# EAGLE board InkTime_v2 (EAGLE 9.7.0)
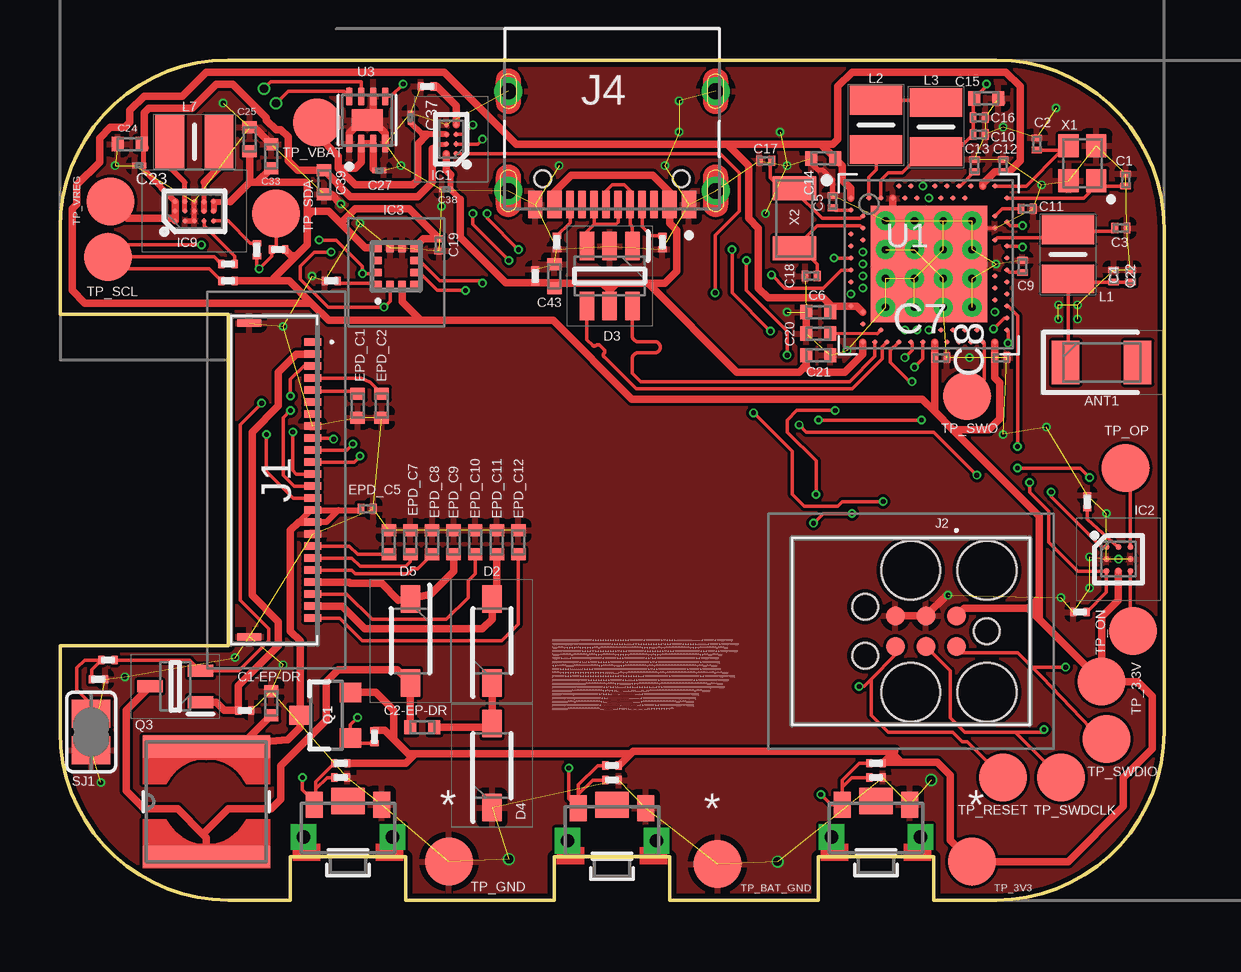
[diagram p0: board, top side]
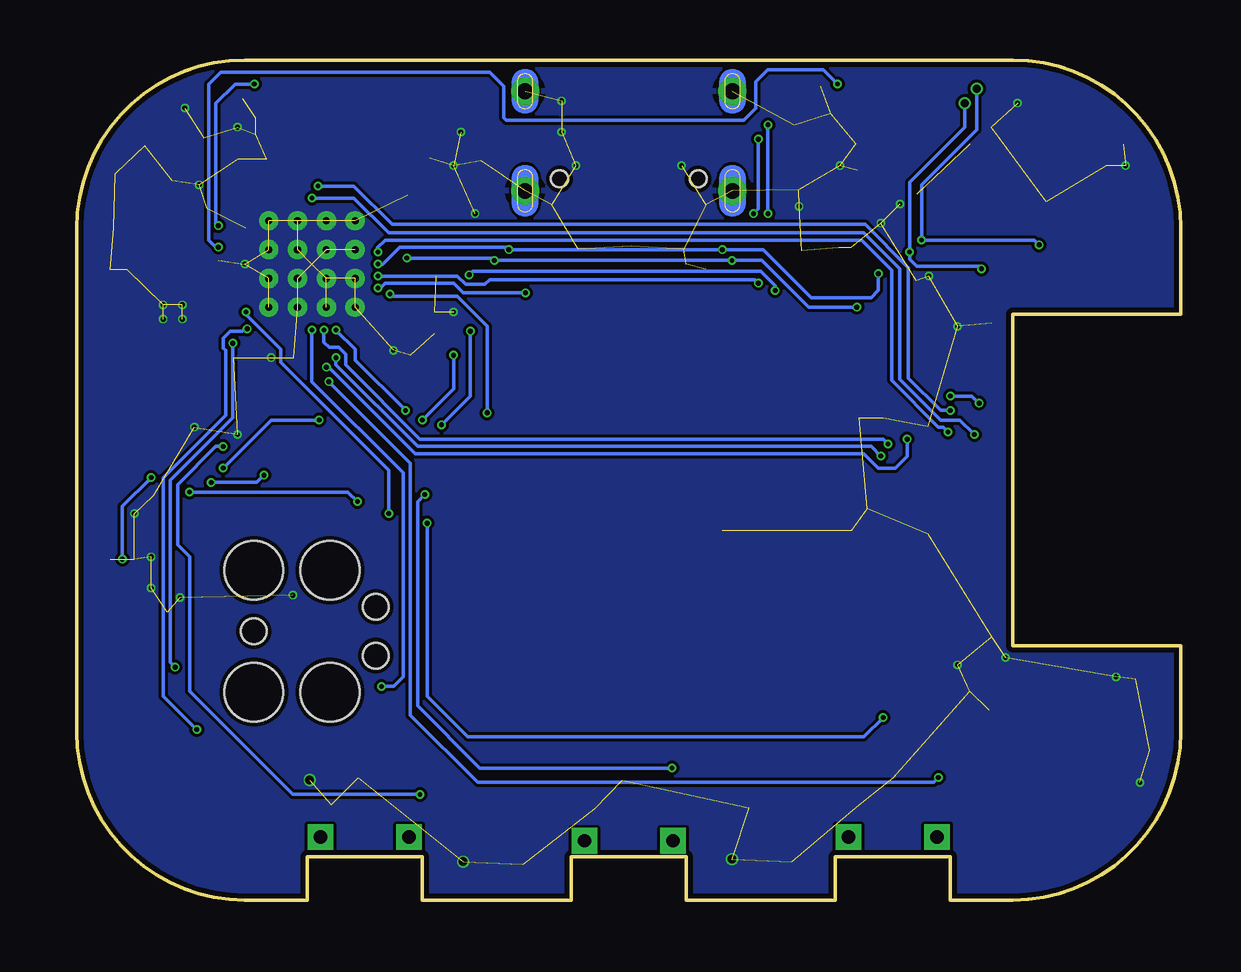
[diagram p1: board, bottom side, seen from below]

Size 46 x 35 mm. Coordinates in mm from the lower left corner, seen from the top.
Outline: 39,0 36.4,0 36.4,1.8 31.6,1.8 31.6,0 25.4,0 25.4,1.8 20.6,1.8 20.6,0 14.4,0 14.4,1.8 9.6,1.8 9.6,0 7,0 arc-90 0,7 0,10.6 7,10.6 7,24.4 0,24.4 0,28 arc-90 7,35 39,35 arc-90 46,28 46,7 arc-90 39,0
Copper layers (1*16): Top 0.035mm / dielectric 1.6mm / Bottom 0.035mm
Design rules "jlcpcb-2layers.dru *": minimum track width 5mil, minimum drill 0.2mm, track to track 5mil, track to pad 5mil, pad to pad 5mil, via to via 5mil, smd to smd 5mil, copper to edge 0.2mm, drill to drill 6mil, minimum pad ring 10mil, minimum via ring 3mil, stop-mask expansion 4mil, vias tented up to drill 999mm, thermal gap 10mil

## Footprints (pad centres in the part's own frame; a part is rotated, then mirrored left to right if it is on the bottom)
2450AT18B100E_ANTC3216X140N = smd 1.15 x 1.8: 1 -1.5,0; 2 1.5,0
NORDIC_NRF_3_RESC0201_L = smd 0.28 x 0.43: 1 -0.255,0; 2 0.255,0
NORDIC_NRF_3_RESC0402_L = smd 0.5 x 0.6: 1 -0.5,0; 2 0.5,0
GRM011R60J152KE01L_2_CAPC0201X13N = smd 0.22 x 0.23: 1 -0.185,0; 2 0.185,0
GRM011R60J152KE01L_1_0201 = smd 0.35 x 0.25: 1 0,0.275; 2 0,-0.275
ESP32_C6_LIBRARY_5_SOD3716X135N = smd 1.15 x 0.8: 1 -1.75,0; 2 1.75,0
ESP32_C6_LIBRARY_3_SOT95P280X145-6N = smd 1.2 x 0.6: 1 -1.25,0.95; 2 -1.25,0; 3 -1.25,-0.95; 4 1.25,-0.95; 5 1.25,0; 6 1.25,0.95
BQ25180YBGR_BGA8C40P2X4_100X155X50 = smd 0.2 x 0.2: A1 -0.2,0.6; A2 0.2,0.6; B1 -0.2,0.2; B2 0.2,0.2; C1 -0.2,-0.2; C2 0.2,-0.2; D1 -0.2,-0.6; D2 0.2,-0.6
DRV2605YZFR_BGA9C50P3X3_144X144X62 = smd 0.25 x 0.25: A1 -0.5,0.5; A2 0,0.5; A3 0.5,0.5; B1 -0.5,0; B2 0,0; B3 0.5,0; C1 -0.5,-0.5; C2 0,-0.5; C3 0.5,-0.5
BMA423_BMA423 = smd 0.3 x 0.35: 1 -0.75,-0.775; 2 -0.25,-0.775; 3 0.25,-0.775; 4 0.75,-0.775; 7 0.75,0.775; 8 0.25,0.775; 9 -0.25,0.775; 10 -0.75,0.775 | smd 0.35 x 0.3: 5 0.775,-0.25; 6 0.775,0.25; 11 -0.775,0.25; 12 -0.775,-0.25
RT6160AWSC_BGA15C40P3X5_140X230X60 = smd 0.216 x 0.216: A1 -0.4,0.8; A2 0,0.8; A3 0.4,0.8; B1 -0.4,0.4; B2 0,0.4; B3 0.4,0.4; C1 -0.4,0; C2 0,0; C3 0.4,0; D1 -0.4,-0.4; D2 0,-0.4; D3 0.4,-0.4; E1 -0.4,-0.8; E2 0,-0.8; E3 0.4,-0.8
503480-2400_5034802400 = smd 0.3 x 0.7: 1 -5.75,1.525; 2 -5.25,1.525; 3 -4.75,1.525; 4 -4.25,1.525; 5 -3.75,1.525; 6 -3.25,1.525; 7 -2.75,1.525; 8 -2.25,1.525; 9 -1.75,1.525; 10 -1.25,1.525; 11 -0.75,1.525; 12 -0.25,1.525; 13 0.25,1.525; 14 0.75,1.525; 15 1.25,1.525; 16 1.75,1.525; 17 2.25,1.525; 18 2.75,1.525; 19 3.25,1.525; 20 3.75,1.525; 21 4.25,1.525; 22 4.75,1.525; 23 5.25,1.525; 24 5.75,1.525 | smd 0.3 x 1: MP1 -6.54,-1.125; MP2 6.54,-1.125
TC2030-IDC_TC2030IDC = smd 0.783 x 0.783: 1 -0.953,-0.635; 2 -0.953,0.635; 3 0.317,-0.635; 4 0.317,0.635; 5 1.588,-0.635; 6 1.588,0.635 | hole 2.451: -2.223,-2.54; -2.223,2.54; 0.952,-2.54; 0.952,2.54 | hole 1.067: -2.223,0; 2.857,-1.016; 2.857,1.016
KH-TYPE-C-16P_KINGHELM_KH-TYPE-C-16P = smd 0.6 x 1.15: A1_B12 -3.2,4.725; A4_B9 -2.4,4.725; A9_B4 2.4,4.725; A12_B1 3.2,4.725 | smd 0.3 x 1.15: A5 -1.25,4.725; A6 -0.25,4.725; A7 0.25,4.725; A8 1.25,4.725; B5 1.75,4.725; B6 0.75,4.725; B7 -0.75,4.725; B8 -1.75,4.725 | drill 0.65 pad 1.05: SH1 -4.32,0; SH2 4.32,0; SH3 -4.32,4.15; SH4 4.32,4.15 | hole 0.7: -2.89,3.65; 2.89,3.65
MLP2016SR47MT0S1_INDC2016X100N = smd 1.2 x 2.2: 1 -1.028,0; 2 1.028,0
ESP32_C6_LIBRARY_2_IND_4828-WE-TPC_WRE = smd 0.9 x 5.3: 1 -2.286,0; 2 2.286,0
ESP32_C6_LIBRARY_4_ESP32_C6_LIBRARY_4_ESP32_C6_LIBRARY_4_ESP32_C6_LIBRARY_4_ESP32_WROVER_SPARKFUN-DISCRETESEMI_SOT23-3 = smd 0.8 x 0.9: 1 -0.95,-1; 2 0.95,-1; 3 0,1.1
ESP32_C6_LIBRARY_6_SOT65P210X110-3N = smd 1.05 x 0.5: 1 -1.05,0.65; 2 -1.05,-0.65; 3 1.05,0
ERA-1AEB3401C_0201 = smd 0.35 x 0.25: 1 0,0.275; 2 0,-0.275
ESP32_C6_LIBRARY_7_JUMPER_SJ = smd 1.168 x 1.6: 1 -0.762,0; 2 0.762,0
2025-10-22_07-23-44_LIBRARY_SW_EVP-AKE31A_PAN = smd 0.711 x 1.092: 1 -1.4,-0.972; 2 1.4,-0.972 | drill 0.559 pad 0.914 square: 3 -1.848,0.381; 4 1.848,0.381 | smd 1.397 x 1.092: 5 0,-1.124
HECTOR_WATCH_1_TP20R = smd 2 x 2: TP 0,0
NORDIC_NRF_4_AQFN50P700X700X85_HS-74N = smd 4.85 x 4.85: P$74 0,0 | drill 0.3 pad 0.6: P$75 -1.8,1.8; P$76 -0.6,1.8; P$77 0.6,1.8; P$78 1.8,1.8; P$79 -1.8,0.6; P$80 -0.6,0.6; P$81 0.6,0.6; P$82 1.8,0.6; P$83 -1.8,-0.6; P$84 -0.6,-0.6; P$85 0.6,-0.6; P$86 1.8,-0.6; P$87 -1.8,-1.8; P$88 -0.6,-1.8; P$89 0.6,-1.8; P$90 1.8,-1.8 | smd 0.2 x 0.2: P$A8 -1.25,3.25; P$A10 -0.75,3.25; P$A12 -0.25,3.25; P$A14 0.25,3.25; P$A16 0.75,3.25; P$A18 1.25,3.25; P$A20 1.75,3.25; P$A22 2.25,3.25; P$A23 2.75,3.25; P$AA24 3.25,-2.25; P$AB2 -2.75,-2.5; P$AC5 -2,-2.75; P$AC9 -1,-2.75; P$AC11 -0.5,-2.75; P$AC13 0,-2.75; P$AC15 0.5,-2.75; P$AC17 1,-2.75; P$AC19 1.5,-2.75; P$AC21 2,-2.75; P$AC24 3.25,-2.75; P$AD2 -2.75,-3.25; P$AD4 -2.25,-3.25; P$AD6 -1.75,-3.25; P$AD8 -1.25,-3.25; P$AD10 -0.75,-3.25; P$AD12 -0.25,-3.25; P$AD14 0.25,-3.25; P$AD16 0.75,-3.25; P$AD18 1.25,-3.25; P$AD20 1.75,-3.25; P$AD22 2.25,-3.25; P$AD23 2.75,-3.25; P$B1 -3.25,2.75; P$B3 -2.5,2.75; P$B5 -2,2.75; P$B7 -1.5,2.75; P$B9 -1,2.75; P$B11 -0.5,2.75; P$B13 0,2.75; P$B15 0.5,2.75; P$B17 1,2.75; P$B19 1.5,2.75; P$B24 3.25,2.75; P$C1 -3.25,2.25; P$D2 -2.75,2; P$D23 2.75,2; P$E24 3.25,1.75; P$F2 -2.75,1.5; P$F23 2.75,1.5; P$G1 -3.25,1.25; P$H2 -2.75,1; P$H23 2.75,1; P$J1 -3.25,0.75; P$J24 3.25,0.75; P$K2 -2.75,0.5; P$L1 -3.25,0.25; P$L24 3.25,0.25; P$M2 -2.75,0; P$N1 -3.25,-0.25; P$N24 3.25,-0.25; P$P2 -2.75,-0.5; P$P23 2.75,-0.5; P$R1 -3.25,-0.75; P$R24 3.25,-0.75; P$T2 -2.75,-1; P$T23 2.75,-1; P$U1 -3.25,-1.25; P$U24 3.25,-1.25; P$V23 2.75,-1.5; P$W1 -3.25,-1.75; P$W24 3.25,-1.75; P$Y2 -2.75,-2; P$Y23 2.75,-2
ESP32_C6_LIBRARY_SON50P200X200X80-9N = smd 0.76 x 0.27: 1 -0.985,0.75; 2 -0.985,0.25; 3 -0.985,-0.25; 4 -0.985,-0.75; 5 0.985,-0.75; 6 0.985,-0.25; 7 0.985,0.25; 8 0.985,0.75 | smd 0.9 x 1.3: 9 0,0
NORDIC_NRF_BT-XTAL_2016_N = smd 0.95 x 0.85: 1 -0.725,-0.575; 2 0.725,-0.575; 3 0.725,0.575; 4 -0.725,0.575
NORDIC_NRF_1_XTAL_3215_N = smd 1 x 1.8: 1 -1.25,0; 2 1.25,0

## Placement (x,y rotation side)
ANT1  2450AT18B100E  [2450AT18B100E_ANTC3216X140N]  43.4,22.4 0 top
C1  12pF  [NORDIC_NRF_3_RESC0201_L]  44.4,30 90 top
C1-EP-DR  10uF  [NORDIC_NRF_3_RESC0402_L]  8.8,8.2 90 top
C2  12pF  [NORDIC_NRF_3_RESC0201_L]  40.7,31.5 90 top
C2-EP-DR  4.7uF/25V  [NORDIC_NRF_3_RESC0402_L]  15.1,7.2 180 top
C3  1pF  [NORDIC_NRF_3_RESC0201_L]  44.2,28 0 top
C4  1pF  [NORDIC_NRF_3_RESC0201_L]  43.9,26 90 top
C5  100nF  [NORDIC_NRF_3_RESC0201_L]  32.2,29.1 90 top
C6  4.7uF  [NORDIC_NRF_3_RESC0402_L]  31.6,24.5 180 top
C7  100nF  [NORDIC_NRF_3_RESC0201_L]  36.7,22.6 0 top
C8  100nF  [NORDIC_NRF_3_RESC0201_L]  39.2,22.6 0 top
C9  820pF  [NORDIC_NRF_3_RESC0201_L]  40.1,26.4 90 top
C10  N.C.  [NORDIC_NRF_3_RESC0201_L]  38.3,31.9 0 top
C11  100nF  [NORDIC_NRF_3_RESC0201_L]  40.3,28.8 0 top
C12  100nF  [NORDIC_NRF_3_RESC0201_L]  39.3,30.6 90 top
C13  N.C.  [NORDIC_NRF_3_RESC0201_L]  38.1,30.6 90 top
C14  4.7uF  [NORDIC_NRF_3_RESC0402_L]  31.8,30.9 180 top
C15  1.0uF  [NORDIC_NRF_3_RESC0402_L]  38.6,33.4 0 top
C16  47nF  [NORDIC_NRF_3_RESC0201_L]  38.3,32.6 0 top
C17  12pF  [NORDIC_NRF_3_RESC0201_L]  29.4,30.8 0 top
C18  12pF  [NORDIC_NRF_3_RESC0201_L]  31.3,26 0 top
C19  100nF  [NORDIC_NRF_3_RESC0201_L]  15.8,27.3 270 top
C20  4.7uF  [NORDIC_NRF_3_RESC0402_L]  31.6,23.6 180 top
C21  4.7uF  [NORDIC_NRF_3_RESC0402_L]  31.6,22.7 0 top
C22  N.C.  [NORDIC_NRF_3_RESC0201_L]  44.6,26 90 top
C23  0.1uF  [GRM011R60J152KE01L_2_CAPC0201X13N]  3.3,30.6 0 top
C24  10uF  [NORDIC_NRF_3_RESC0402_L]  2.9,31.5 0 top
C25  22uF  [NORDIC_NRF_3_RESC0402_L]  7.9,31.7 90 top
C27  0.1uF  [GRM011R60J152KE01L_2_CAPC0201X13N]  13.3,30.4 180 top
C29  1uF  [GRM011R60J152KE01L_1_0201]  34,5.1 90 top
C30  1uF  [GRM011R60J152KE01L_1_0201]  11.7,5.1 90 top
C31  1uF  [GRM011R60J152KE01L_1_0201]  23,5 90 top
C32  1uF  [GRM011R60J152KE01L_1_0201]  42.8,16.6 0 top
C33  22uF  [NORDIC_NRF_3_RESC0402_L]  8.8,31 90 top
C34  0.1uF  [GRM011R60J152KE01L_1_0201]  42.5,12 90 top
C37  1uF  [GRM011R60J152KE01L_2_CAPC0201X13N]  14.6,32.6 270 top
C38  1uF  [GRM011R60J152KE01L_2_CAPC0201X13N]  16.1,29.6 0 top
C39  10uF  [NORDIC_NRF_3_RESC0402_L]  11,29.9 270 top
C42  0.1uF  [GRM011R60J152KE01L_1_0201]  19.8,26 180 top
C43  4.7uF  [NORDIC_NRF_3_RESC0402_L]  20.6,26 90 top
D2  MBR0530  [ESP32_C6_LIBRARY_5_SOD3716X135N]  18,10.8 90 top
D3  USBLC6-2SC6Y  [ESP32_C6_LIBRARY_3_SOT95P280X145-6N]  22.9,26 270 top
D4  MBR0530  [ESP32_C6_LIBRARY_5_SOD3716X135N]  18,5.6 90 top
D5  MBR0530  [ESP32_C6_LIBRARY_5_SOD3716X135N]  14.6,10.8 270 top
EPD_C1  1uF/50V  [NORDIC_NRF_3_RESC0402_L]  12.4,20.6 90 top
EPD_C2  1uF/50V  [NORDIC_NRF_3_RESC0402_L]  13.4,20.6 90 top
EPD_C5  0.1uF/50V  [NORDIC_NRF_3_RESC0201_L]  12.8,16.3 180 top
EPD_C6  1uF/50V  [NORDIC_NRF_3_RESC0402_L]  13.7,14.9 270 top
EPD_C7  1uF/50V  [NORDIC_NRF_3_RESC0402_L]  14.6,14.9 270 top
EPD_C8  1uF/50V  [NORDIC_NRF_3_RESC0402_L]  15.5,14.9 270 top
EPD_C9  1uF/50V  [NORDIC_NRF_3_RESC0402_L]  16.4,14.9 270 top
EPD_C10  1uF/50V  [NORDIC_NRF_3_RESC0402_L]  17.3,14.9 270 top
EPD_C11  1uF/50V  [NORDIC_NRF_3_RESC0402_L]  18.2,14.9 270 top
EPD_C12  1uF/50V  [NORDIC_NRF_3_RESC0402_L]  19.1,14.9 270 top
IC1  BQ25180YBGR_BQ25180YBGR  [BQ25180YBGR_BGA8C40P2X4_100X155X50]  16.3,31.7 180 top
IC2  DRV2605YZFR  [DRV2605YZFR_BGA9C50P3X3_144X144X62]  44.1,14.2 0 top
IC3  BMA423  [BMA423_BMA423]  14,26.4 0 top
IC9  RT6160AWSC  [RT6160AWSC_BGA15C40P3X5_140X230X60]  5.6,28.7 90 top
J1  503480-2400  [503480-2400_5034802400]  9,17.5 270 top
J2  TC2030-IDC  [TC2030-IDC_TC2030IDC]  36.4,11.2 180 top
J4  KH-TYPE-C-16P  [KH-TYPE-C-16P_KINGHELM_KH-TYPE-C-16P]  23,33.7 180 top
L1  3.9nH  [MLP2016SR47MT0S1_INDC2016X100N]  42,26.9 90 top
L2  10uH  [MLP2016SR47MT0S1_INDC2016X100N]  34,32.3 90 top
L3  15uH  [MLP2016SR47MT0S1_INDC2016X100N]  36.5,32.2 270 top
L5  68uH  [ESP32_C6_LIBRARY_2_IND_4828-WE-TPC_WRE]  6.1,4.1 90 top
L7  FTC252012SR47MBCA  [MLP2016SR47MT0S1_INDC2016X100N]  5.6,31.6 0 top
Q1  20V/4.2A/52mΩ/1.4W  [ESP32_C6_LIBRARY_4_ESP32_C6_LIBRARY_4_ESP32_C6_LIBRARY_4_ESP32_C6_LIBRARY_4_ESP32_WROVER_SPARKFUN-DISCRETESEMI_SOT23-3]  11.1,7.7 90 top
Q3  SI1308EDL-T1-GE3  [ESP32_C6_LIBRARY_6_SOT65P210X110-3N]  4.8,8.9 180 top
R1_EP_DR  0.47  [ERA-1AEB3401C_0201]  2,10 90 top
R1_USB  5K1  [ERA-1AEB3401C_0201]  25.1,27.4 180 top
R2  0  [ERA-1AEB3401C_0201]  8.2,27.1 180 top
R2_EP_DR  10K  [ERA-1AEB3401C_0201]  7.7,7.9 270 top
R2_USB  5K1  [ERA-1AEB3401C_0201]  20.7,27.4 0 top
R3  0  [ERA-1AEB3401C_0201]  11.3,25.8 90 top
R4  0  [ERA-1AEB3401C_0201]  7,26.5 90 top
R5  10K  [ERA-1AEB3401C_0201]  11.7,5.7 90 top
R7  10K  [ERA-1AEB3401C_0201]  34,5.7 90 top
R8  10K  [ERA-1AEB3401C_0201]  23,5.6 90 top
R9  10K  [ERA-1AEB3401C_0201]  15.3,33.9 90 top
R17  3K3  [ERA-1AEB3401C_0201]  7,25.8 270 top
R18  3K3  [ERA-1AEB3401C_0201]  9.1,27.1 270 top
R_PWR_EPD  10K  [ERA-1AEB3401C_0201]  13.1,6.8 180 top
R_TYPE_SEL  2.2  [ERA-1AEB3401C_0201]  1.6,9.2 270 top
SJ1  [ESP32_C6_LIBRARY_7_JUMPER_SJ]  1.3,7 90 top
SW_DN  2025-10-22_07-23-44_LIBRARY_EVP-AKE31ASW_EVP-AKE31A_PAN  [2025-10-22_07-23-44_LIBRARY_SW_EVP-AKE31A_PAN]  34,3 180 top
SW_ENT  2025-10-22_07-23-44_LIBRARY_EVP-AKE31ASW_EVP-AKE31A_PAN  [2025-10-22_07-23-44_LIBRARY_SW_EVP-AKE31A_PAN]  23,2.85 180 top
SW_UP  2025-10-22_07-23-44_LIBRARY_EVP-AKE31ASW_EVP-AKE31A_PAN  [2025-10-22_07-23-44_LIBRARY_SW_EVP-AKE31A_PAN]  12,3 180 top
TP_3.3V  HECTOR_WATCH_1_TPTP20R  [HECTOR_WATCH_1_TP20R]  43.4,9.1 270 top
TP_3V3  HECTOR_WATCH_1_TPTP20R  [HECTOR_WATCH_1_TP20R]  38,1.6 0 top
TP_BAT_GND  HECTOR_WATCH_1_TPTP20R  [HECTOR_WATCH_1_TP20R]  27.4,1.5 180 top
TP_GND  HECTOR_WATCH_1_TPTP20R  [HECTOR_WATCH_1_TP20R]  16.2,1.6 0 top
TP_ON  HECTOR_WATCH_1_TPTP20R  [HECTOR_WATCH_1_TP20R]  44.7,11.2 90 top
TP_OP  HECTOR_WATCH_1_TPTP20R  [HECTOR_WATCH_1_TP20R]  44.4,18 0 top
TP_RESET  HECTOR_WATCH_1_TPTP20R  [HECTOR_WATCH_1_TP20R]  39.3,5.1 0 top
TP_SCL  HECTOR_WATCH_1_TPTP20R  [HECTOR_WATCH_1_TP20R]  2,26.8 0 top
TP_SDA  HECTOR_WATCH_1_TPTP20R  [HECTOR_WATCH_1_TP20R]  9,28.6 90 top
TP_SWDCLK  HECTOR_WATCH_1_TPTP20R  [HECTOR_WATCH_1_TP20R]  41.7,5.1 0 top
TP_SWDIO  HECTOR_WATCH_1_TPTP20R  [HECTOR_WATCH_1_TP20R]  43.6,6.7 0 top
TP_SWO  HECTOR_WATCH_1_TPTP20R  [HECTOR_WATCH_1_TP20R]  37.8,21 270 top
TP_VBAT  HECTOR_WATCH_1_TPTP20R  [HECTOR_WATCH_1_TP20R]  10.7,32.4 180 top
TP_VREG  HECTOR_WATCH_1_TPTP20R  [HECTOR_WATCH_1_TP20R]  2.1,29.1 0 top
U1  NRF52840_QF  [NORDIC_NRF_4_AQFN50P700X700X85_HS-74N]  36.2,26.5 0 top
U3  MAX17048G+T10  [ESP32_C6_LIBRARY_SON50P200X200X80-9N]  12.8,32.5 90 top
X1  32MHz  [NORDIC_NRF_BT-XTAL_2016_N]  42.6,30.7 90 top
X2  32.768kHz  [NORDIC_NRF_1_XTAL_3215_N]  30.6,28.4 270 top

## Library data of the parts
ANT1 = InkTime_v5; ARROW_PART_NUMBER: 2450AT18B100E; ARROW_PRICE-STOCK: https://www.arrow.com/en/products/2450at18b100e/johanson-dielectrics?utm_currency=USD&region=nac; DESCRIPTION: Antennas 2.45GHz ANTENNA; HEIGHT: 1.4mm; MANUFACTURER_NAME: JOHANSON TECHNOLOGY; MANUFACTURER_PART_NUMBER: 2450AT18B100E; MOUSER_PART_NUMBER: 609-2450AT18B100E; MOUSER_PRICE-STOCK: https://www.mouser.co.uk/ProductDetail/Johanson-Technology/2450AT18B100E?qs=yCnrNFeXz%252Bh5MFsFIXGZGA%3D%3D
C1 C1-EP-DR C2 C2-EP-DR C3-C22 C24 C25 C29-C34 C39 C42 C43 EPD_C1 EPD_C2 EPD_C5-EPD_C12 R1_EP_DR R1_USB R2 R2_EP_DR R2_USB R3-R5 R7-R9 R17 R18 R_PWR_EPD R_TYPE_SEL SJ1 TP_3.3V TP_3V3 TP_BAT_GND TP_GND TP_ON TP_OP TP_RESET TP_SCL TP_SDA TP_SWDCLK TP_SWDIO TP_SWO TP_VBAT TP_VREG U1 X1 X2 = InkTime_v5
C23 C27 C37 C38 = InkTime_v5; AVAILABILITY: In Stock; CHECK_PRICES: https://www.snapeda.com/parts/GRM011R60J152KE01L/Murata/view-part/?ref=eda; DESCRIPTION: SMD Capacitor X5R(EIA) with Capacitance: 1500pF Tol. 10%. Rated Voltage: 6.3Vdc; MF: Murata; MP: GRM011R60J152KE01L; PACKAGE: 0201 Murata; PRICE: None; SNAPEDA_LINK: https://www.snapeda.com/parts/GRM011R60J152KE01L/Murata/view-part/?ref=snap
D2 D4 D5 = InkTime_v5; AVAILABILITY: In Stock; CHECK_PRICES: https://www.snapeda.com/parts/MBR0530/Onsemi/view-part/?ref=eda; DESCRIPTION: Diode Schottky 30 V 500mA Surface Mount SOD-123; MF: ON Semiconductor; MP: MBR0530; PACKAGE: SOD-123-2 ON Semiconductor; PRICE: None; PURCHASE-URL: https://www.snapeda.com/api/url_track_click_mouser/?unipart_id=179458&manufacturer=ON Semiconductor&part_name=MBR0530&search_term=None; SNAPEDA_LINK: https://www.snapeda.com/parts/MBR0530/Onsemi/view-part/?ref=snap
D3 = InkTime_v5; AVAILABILITY: In Stock; CHECK_PRICES: https://www.snapeda.com/parts/USBLC6-2SC6Y/STMicroelectronics/view-part/?ref=eda; DESCRIPTION: 17V Clamp 5A (8/20µs) Ipp Tvs Diode Surface Mount SOT-23-6; MF: STMicroelectronics; MP: USBLC6-2SC6Y; PACKAGE: SOT-23-6 STMicroelectronics; PRICE: None; SNAPEDA_LINK: https://www.snapeda.com/parts/USBLC6-2SC6Y/STMicroelectronics/view-part/?ref=snap
IC1 = InkTime_v5; ARROW_PART_NUMBER: BQ25180YBGR; ARROW_PRICE-STOCK: https://www.arrow.com/en/products/bq25180ybgr/texas-instruments?utm_currency=USD&region=nac; DESCRIPTION: Charger IC Lithium Ion/Polymer, Lithium Iron Phosphate 8-DSBGA (1.6x1.1); HEIGHT: 0.5mm; MANUFACTURER_NAME: Texas Instruments; MANUFACTURER_PART_NUMBER: BQ25180YBGR; MOUSER_PART_NUMBER: 595-BQ25180YBGR; MOUSER_PRICE-STOCK: https://www.mouser.co.uk/ProductDetail/Texas-Instruments/BQ25180YBGR?qs=doiCPypUmgEWjAK%252BJAX6Tw%3D%3D
IC2 = InkTime_v5; ARROW_PART_NUMBER: DRV2605YZFR; ARROW_PRICE-STOCK: https://www.arrow.com/en/products/drv2605yzfr/texas-instruments?region=nac; DESCRIPTION: Haptic Driver for ERM/LRA with Built-In Library and Smart Loop Architecture; HEIGHT: 0.625mm; MANUFACTURER_NAME: Texas Instruments; MANUFACTURER_PART_NUMBER: DRV2605YZFR
IC3 = InkTime_v5; ARROW_PART_NUMBER: BMA423; ARROW_PRICE-STOCK: https://www.arrow.com/en/products/bma423/bosch; DESCRIPTION: Accelerometers Triaxial low-g 12bit Acceleration Sensor; HEIGHT: 1mm; MANUFACTURER_NAME: BOSCH; MANUFACTURER_PART_NUMBER: BMA423; MOUSER_PART_NUMBER: 262-BMA423; MOUSER_PRICE-STOCK: https://www.mouser.co.uk/ProductDetail/Bosch-Sensortec/BMA423?qs=HXFqYaX1Q2xC%252BSgeGoX3mg%3D%3D
IC9 = InkTime_v5; DESCRIPTION: Buck-Boost Regulator Positive Output Step-Up/Step-Down I2C DC-DC Controller IC 15-WL-CSP (BSC) (1.4x2.3); HEIGHT: 0.6mm; MANUFACTURER_NAME: RICHTEK; MANUFACTURER_PART_NUMBER: RT6160AWSC; MOUSER_PART_NUMBER: 835-RT6160AWSC; MOUSER_PRICE-STOCK: https://www.mouser.co.uk/ProductDetail/Richtek/RT6160AWSC?qs=amGC7iS6iy%2FLd9PSoixZXQ%3D%3D
J1 = InkTime_v5; DESCRIPTION: FFC & FPC Connectors 0.5mm FPC RA SMT Dual Contact 24Ckt; HEIGHT: 1.87mm; MANUFACTURER_NAME: Molex; MANUFACTURER_PART_NUMBER: 503480-2400; MOUSER_PART_NUMBER: 538-503480-2400; MOUSER_PRICE-STOCK: https://www.mouser.co.uk/ProductDetail/Molex/503480-2400?qs=OAhjpuo3Vu7efIoxFh9AOw%3D%3D
J2 = InkTime_v5; DESCRIPTION: CABLE ADAPTER 6 POS; HEIGHT: 19mm; MANUFACTURER_NAME: Tag Connect; MANUFACTURER_PART_NUMBER: TC2030-IDC
J4 = InkTime_v5; AVAILABILITY: Not in stock; CHECK_PRICES: https://www.snapeda.com/parts/KH-TYPE-C-16P/Kinghelm/view-part/?ref=eda; MF: kinghelm; MP: KH-TYPE-C-16P; PACKAGE: None; PRICE: None; SNAPEDA_LINK: https://www.snapeda.com/parts/KH-TYPE-C-16P/Kinghelm/view-part/?ref=snap
L1-L3 L7 = InkTime_v5; DESCRIPTION: SMD / SMT Inductors (Coils), L=0.47?H, L x W x T :; HEIGHT: 1mm; JLCPCB: https://jlcpcb.com/partdetail/6763488-FTC252012SR47MBCA/C5832368; MANUFACTURER_NAME: TDK; MANUFACTURER_PART_NUMBER: FTC252012SR47MBCA
L5 = InkTime_v5; COPYRIGHT: Copyright (C) 2024 Ultra Librarian. All rights reserved.; MANUFACTURER_PART_NUMBER: 744043680; MFR_NAME: Wurth Electronics
Q1 = InkTime_v5; PROD_ID: TRAN-14388
Q3 = InkTime_v5; AVAILABILITY: In Stock; CHECK_PRICES: https://www.snapeda.com/parts/SI1308EDL-T1-GE3/Vishay+Siliconix/view-part/?ref=eda; DESCRIPTION: Si1308EDL-T1-GE3 N-channel MOSFET Transistor, 1.5 A, 30 V, 3-Pin SC-70 | Siliconix / Vishay SI1308EDL-T1-GE3; MF: Vishay Siliconix; MP: SI1308EDL-T1-GE3; PACKAGE: SOT-323 Vishay Semiconductor; PRICE: None; PURCHASE-URL: https://www.snapeda.com/api/url_track_click_mouser/?unipart_id=274603&manufacturer=Vishay Siliconix&part_name=SI1308EDL-T1-GE3&search_term=None; SNAPEDA_LINK: https://www.snapeda.com/parts/SI1308EDL-T1-GE3/Vishay+Siliconix/view-part/?ref=snap
SW_DN SW_ENT SW_UP = InkTime_v5; COPYRIGHT: Copyright (C) 2025 Ultra Librarian. All rights reserved.; DIGI-KEY_PART_NUMBER_1: P123437TR-ND; DIGI-KEY_PART_NUMBER_2: P123437CT-ND; DIGI-KEY_PART_NUMBER_3: P123437DKR-ND; MANUFACTURER_NAME: Panasonic; MANUFACTURER_PART_NUMBER: EVP-AKE31A
U3 = InkTime_v5; AVAILABILITY: In Stock; CHECK_PRICES: https://www.snapeda.com/parts/MAX17048G+T10/Analog+Devices/view-part/?ref=eda; DESCRIPTION: 3µA 1-Cell/2-Cell Fuel Gauge with ModelGauge; MF: Analog Devices; MP: MAX17048G+T10; PACKAGE: TDFN-8 Maxim; PRICE: None; PURCHASE-URL: https://www.snapeda.com/api/url_track_click_mouser/?unipart_id=329239&manufacturer=Analog Devices&part_name=MAX17048G+T10&search_term=None; SNAPEDA_LINK: https://www.snapeda.com/parts/MAX17048G+T10/Analog+Devices/view-part/?ref=snap

## Nets
3V3: C6.1 C7.1 C8.1 C12.1 C14.1 C19.1 C25.1 C33.1 IC2.C2 IC3.3 IC3.7 IC3.10 IC9.E2 IC9.E3 J2.1 Q1.2 R5.2 R7.2 R8.2 R17.1 R18.1 R_PWR_EPD.2 TP_3.3V.TP TP_3V3.TP U1.P$A22 U1.P$AD14 U1.P$AD23 U1.P$B1 U1.P$W1 U1.P$Y2
ALERT: U1.P$J24 U3.5
D+: D3.4 U1.P$AD6
D-: D3.6 U1.P$AD4
DEC1: C5.1 U1.P$C1
DEC3: C11.1 U1.P$D23
DEC4_6: C10.1 C15.1 C16.1 L3.2 U1.P$B5 U1.P$E24
DN: D3.1 J4.A7 J4.B7
DP: D3.3 J4.A6 J4.B6
EPD_3V3: C1-EP-DR.1 EPD_C5.2 J1.15 J1.16 L5.2 Q1.3
EPD_BUSY: J1.9 U1.P$AD12
EPD_CS: J1.12 U1.P$K2
EPD_DC: J1.11 U1.P$AD10
EPD_RST: J1.10 U1.P$AC11
GDR: J1.2 Q3.1 R2_EP_DR.2
GND: C1-EP-DR.2 C1.2 C2.2 C3.2 C4.2 C5.2 C6.2 C7.2 C8.2 C9.2 C10.2 C11.2 C12.2 C13.2 C14.2 C15.2 C16.2 C17.1 C18.1 C19.2 C20.2 C21.2 C22.2 C23.1 C24.1 C25.2 C27.1 C29.2 C30.2 C31.2 C32.1 C33.2 C34.1 C37.1 C38.1 C39.2 C42.2 C43.2 D3.2 D4.1 EPD_C1.1 EPD_C2.1 EPD_C5.1 EPD_C6.1 EPD_C7.1 EPD_C8.1 EPD_C9.1 EPD_C10.1 EPD_C11.1 EPD_C12.1 IC1.D2 IC2.B1 IC2.B3 IC3.8 IC3.9 IC9.B1 IC9.C1 IC9.C2 IC9.C3 J1.8 J1.17 J1.MP1 J1.MP2 J2.3 J2.5 J4.A1_B12 J4.A12_B1 J4.SH1 J4.SH2 J4.SH3 J4.SH4 R1_USB.1 R2_EP_DR.1 R2_USB.2 R3.1 R9.1 R_TYPE_SEL.1 SJ1.1 SW_DN.1 SW_ENT.1 SW_UP.1 TP_BAT_GND.TP TP_GND.TP U1.P$74 U1.P$75 U1.P$76 U1.P$77 U1.P$78 U1.P$79 U1.P$80 U1.P$81 U1.P$82 U1.P$83 U1.P$84 U1.P$85 U1.P$86 U1.P$87 U1.P$88 U1.P$89 U1.P$90 U1.P$B7 U1.P$F23 U3.1 U3.4 U3.6 U3.9 X1.2 X1.4
HAPTIC_EN: IC2.A1 U1.P$U1
IMU_INT1: IC3.5 U1.P$N1
IMU_INT2: IC3.6 U1.P$P2
LX1: IC9.B2 IC9.B3 L7.1
LX2: IC9.D2 IC9.D3 L7.2
MOSI: J1.14 U1.P$B13
N$1: IC9.D1 R4.2
N$2: IC1.D1 R9.2
N$3: IC3.1 R3.2
N$4: IC9.E1 R2.2
N$6: L2.2 L3.1
N$8: L2.1 U1.P$B3
N$9: C13.1 U1.P$A18
N$10: C3.1 L1.2 U1.P$H23
N$11: C2.1 U1.P$A23 X1.3
N$12: C1.1 U1.P$B24 X1.1
N$13: ANT1.1 C4.1 C22.1 L1.1
N$14: C9.1 U1.P$N24
N$15: EPD_C12.2 J1.24
N$16: C20.1 U1.P$AC5
N$17: C2-EP-DR.2 D5.2 L5.1 Q3.3
N$18: C2-EP-DR.1 D2.1 D4.2
N$20: R1_EP_DR.1 R_TYPE_SEL.2 SJ1.2
N$21: J4.A5 R1_USB.2
N$22: EPD_C10.2 J1.22
N$23: J4.B5 R2_USB.1
N$24: EPD_C8.2 J1.20
N$25: EPD_C7.2 J1.19
N$26: EPD_C6.2 J1.18
N$27: EPD_C2.2 J1.4
N$28: EPD_C1.2 J1.5
N$32: C32.2 IC2.A2
OUT+: IC2.A3 TP_OP.TP
OUT-: IC2.C3 TP_ON.TP
P0.00/XL1: C17.2 U1.P$D2 X2.1
P0.01/XL2: C18.2 U1.P$F2 X2.2
P0.04: U1.P$J1
P0.09: U1.P$L24
P0.13: C30.1 R5.1 SW_UP.2 U1.P$AD8
P0.14: C31.1 R8.1 SW_ENT.2 U1.P$AC9
P0.19: U1.P$AC15
P0.20: U1.P$AD16
P0.21: U1.P$AC17
P0.22: U1.P$AD18
P0.23: U1.P$AC19
P0.24: U1.P$AD20
P0.25: U1.P$AC21
P0.26: U1.P$G1
P0.27: U1.P$H2
P0.28: U1.P$B11
P0.29: U1.P$A10
P0.30: U1.P$B9
P0.31: U1.P$A8
P1.01: Q1.1 R_PWR_EPD.1 U1.P$Y23
P1.02: C29.1 R7.1 SW_DN.2 U1.P$W24
P1.03: U1.P$V23
P1.04: U1.P$U24
P1.05: U1.P$T23
P1.06: U1.P$R24
P1.07: U1.P$P23
P1.09: U1.P$R1
P1.10: U1.P$A20
P1.11: U1.P$B19
P1.12: U1.P$B17
P1.13: U1.P$A16
P1.14: U1.P$B15
P1.15: U1.P$A14
PMIC_INT: IC1.A1 U1.P$T2
PREVGH: D5.1 EPD_C9.2 J1.21
PREVGL: D2.2 EPD_C11.2 J1.23
RESE: J1.3 Q3.2 R1_EP_DR.2
RESET: J2.6 TP_RESET.TP U1.P$AC13
SCK: J1.13 U1.P$A12
SCL: C34.2 IC1.B1 IC2.C1 IC3.12 R4.1 R17.2 TP_SCL.TP U1.P$M2 U3.7
SDA: IC1.C1 IC2.B2 IC3.2 R2.1 R18.2 TP_SDA.TP U1.P$L1 U3.8
SWDCLK: J2.4 TP_SWDCLK.TP U1.P$AA24
SWDIO: J2.2 TP_SWDIO.TP U1.P$AC24
SWO: TP_SWO.TP U1.P$AD22
VBAT: C27.2 C37.2 IC1.C2 TP_VBAT.TP U3.2 U3.3
VBUS: C21.1 C38.2 C42.1 C43.1 D3.5 IC1.A2 J4.A4_B9 J4.A9_B4 U1.P$AD2
VREG: C23.2 C24.2 C39.1 IC1.B2 IC9.A1 IC9.A2 IC9.A3 TP_VREG.TP

## Tracks (layer width: path | path; a pad name or v marks a point on that pad's centre or on a via)
3V3
  Top 0.254: IC9.E2 IC9.E3 7.1,29.1
  Top 0.305: 7.9,29.9 C25.1 | 7.1,29.1 7.9,29.9 | J2.1 37.67,12.15 40.35,12.15 | R7.2 34.34,5.76 | 34.34,5.76 34.67,6.1 | 34.67,6.1 34.77,6.2 23.88,6.2 23.77,6.1 | R8.2 23.77,6.1 | TP_3.3V.TP 40.75,11.75 | 40.75,11.75 40.35,12.15 | 35.05,5.75 34.7,6.1 34.67,6.1 | 35.05,5.75 36.55,5.75 37.1,5.2 37.1,2.5 TP_3V3.TP 42,1.6 44.3,3.9 44.3,5.1 45.5,6.3 45.5,8.5 44.9,9.1 TP_3.3V.TP | 35.05,5.75 34.35,5.75 34.34,5.76 | 40.8,12.6 40.8,16 37.2,19.6 | 40.8,12.2 40.8,11.8 40.75,11.75 | 40.35,12.15 40.75,12.15 40.8,12.2 | 40.8,12.6 40.35,12.15 | 40.8,12.6 40.8,12.2 | 11.7,28.2 12.3,28.8 14.55,28.8 C19.1 15.13,27.55 IC3.7 | 27.8,31.5 19,31.5 16,34.5 6.1,34.5 5.1,33.5 3.5,33.5 2.9,32.9 2.9,32.4 2.7,32.2 2.1,32.2 1.65,31.75 1.65,30.75 0.7,29.8 0.7,29 0.5,28.8 0.5,25.4 1.02,24.88 10.47,24.88 | 27.8,31.5 31.7,31.5 | 31.7,31.5 C14.1 32.6,30.6 32.6,30 32.95,29.65 U1.P$B1 | 27.8,31.5 28.7,30.6 28.7,28.4 29.1,28 29.1,25.5 29.5,25.1 31.8,25.1 32.1,24.8 | 32.1,24.8 C6.1 | 32.1,24.8 32.15,24.75 U1.P$W1 33.2,24.75 U1.P$Y2 | 31.7,31.5 32.2,31.5 32.4,31.7 32.4,33.9 33,34.5 39.4,34.5 40,33.9 40,30.8 39.55,30.34 C12.1 38.95,30.34 38.45,29.85 U1.P$A22 | U1.P$AD14 C7.1 36.45,20.36 | 37.2,19.6 38.7,19.6 39.16,20.05 39.16,21.55 38.95,21.75 C8.1 U1.P$AD23 | 37.2,19.6 36.45,20.36 | 14.8,6.1 23.77,6.1 | 14.8,6.1 14.4,5.7 R5.2 | 14.8,6.1 14.5,6.1 13.9,6.7 | 13.9,6.7 13.9,7.9 13.15,8.65 Q1.2 | 13.9,6.7 13.53,7.07 R_PWR_EPD.2 | 36.45,20.36 35.92,20.88 23.82,20.88 20.55,24.15 15.03,24.15 | IC3.10 12.72,27.18 11.7,28.2 | 7.9,29.9 8.2,29.9 | 8.2,29.9 C33.1 | 8.2,29.9 10.2,29.9 10.3,29.8 10.3,28.5 | 11.7,28.2 11.2,28.7 10.5,28.7 10.3,28.5 | 15.03,24.15 14.25,24.93 IC3.3
  Top 0.305: 10.3,28.5 10.3,27.3 9.85,26.85 | 9.85,26.85 8.9,25.9 9,25.8 | 9,25.8 R17.1 | 9.85,26.85 9.62,26.85 R18.1 | 15.03,24.15 11.2,24.15 10.47,24.88 | 10.47,24.88 9.55,25.8 9,25.8 | TP_3.3V.TP 43.4,11.8 44.1,12.5 IC2.C2
ALERT  (via drill 0.2)
  Top 0.15: U3.5 13.79,33.48 v14.3,34 | v40.1,27.2 40.05,27.25 U1.P$J24
  Bottom 0.15: v14.3,34 14.9,34.6 17.2,34.6 17.7,34.1 17.7,33 18.2,32.5 28.1,32.5 28.2,32.6 28.2,33.9 28.8,34.5 40,34.5 40.5,34 40.5,27.5 40.2,27.2 v40.1,27.2
D+
  Top 0.15: D3.4 21.95,23.35 22.19,23.11 arc90 22.34,23.11 arc-90 22.49,23.11 22.67,22.93 arc-90 22.67,22.78 arc90 22.67,22.63 24,21.3 33,21.3 34.25,22.55 34.25,23.05 U1.P$AD6
D-
  Top 0.15: D3.6 23.85,23.5 arc90 24.08,23.27 24.78,23.27 arc-90 25.01,23.03 arc-90 24.78,22.8 24.08,22.8 arc90 23.85,22.57 23.85,21.95 24.2,21.6 32.9,21.6 33.95,22.65 U1.P$AD4
DEC1
  Top 0.15: C5.1 32.3,28.75 U1.P$C1
DEC3
  Top 0.15: U1.P$D23 39.25,28.8 C11.1
DEC4_6  (via drill 0.2)
  Top 0.15: U1.P$B5 34.2,30 34.5,30.3 35.1,30.3 35.97,31.17 L3.2 37.32,31.17 C10.1 C16.1 38.05,33.34 C15.1 38.6,33.9 v38.6,34 | U1.P$E24 39.6,28.1 v40.1,28.1
  Bottom 0.15: v40.1,28.1 40.2,28.2 40.2,33.2 39.4,34 v38.6,34
DN
  Top 0.15: D3.1 23.85,28.05 23.75,28.15 J4.B7 23.75,29.55 23.5,29.8 23,29.8 22.75,29.55 J4.A7
DP
  Top 0.15: 22.25,28.15 21.95,27.85 D3.3 | 22.25,28.15 J4.B6 | J4.A6 23.25,28.25 23.15,28.15 22.25,28.15
EPD_3V3
  Top 0.254: 9.95,15.75 10.45,16.25 J1.15 11.6,16.25 | EPD_C5.2 12.49,16.25 11.6,16.25 | 11.6,16.25 11.1,15.75 J1.16
  Top 0.305: J1.16 9.95,15.75 9.6,15.4 9.6,11.2 10,10.8 Q1.3 10,7.2 9.49,6.69 L5.2 7.79,6.69 C1-EP-DR.1
EPD_BUSY  (via drill 0.2)
  Top 0.15: J1.9 11.35,19.25 v11.4,19.2 | v35.6,22.2 35.95,22.55 U1.P$AD12
  Bottom 0.15: v35.6,22.2 35.5,22.2 31.9,18.6 13.2,18.6 12.6,18 11.9,18 11.4,18.5 v11.4,19.2
EPD_CS  (via drill 0.2)
  Top 0.15: J1.12 9.85,17.75 9.7,17.9 v9.7,19.5
  Bottom 0.15: U1.P$K2 33.45,27.2 33.15,27.5 13.3,27.5 12.05,26.25 12.05,21.65 10.1,19.7 9.9,19.7 v9.7,19.5
  other vias: 33.45,27
EPD_DC  (via drill 0.2)
  Top 0.15: J1.11 12.25,18.25 v12.5,18.5 | v35.2,22.6 35.5,22.9 35.5,23.2 U1.P$AD10
  Bottom 0.15: v35.2,22.6 35.2,22.3 31.8,18.9 12.9,18.9 v12.5,18.5
EPD_RST  (via drill 0.2)
  Top 0.15: J1.10 11.95,18.75 v12.2,19
  Bottom 0.15: v12.2,19 12.4,19.2 31.7,19.2 34.8,22.3 34.8,22.75 35.08,23.02 35.48,23.02 35.7,23.25 U1.P$AC11
  other vias: 35.7,23.75
GDR
  Top 0.305: Q3.1 6.5,8.25 6.85,7.9 R2_EP_DR.2 7.43,8.93 9.1,10.6 9.1,11.6 8,12.7 8,19.5 9.1,20.6 9.1,22 9.85,22.75 J1.2
GND  (via drill 0.2, 0.35)  (133 unrouted)
  Top 0.15: U1.P$F23 38.3,28 U1.P$78
  Top 0.2: C15.2 39.3,33.2 | IC9.B1 IC9.C1 IC9.C2 IC9.C3 | C5.2 32.2,30 31.8,30.4 31.6,30.4 31.3,30.7 C14.2
  Top 0.305: U1.P$B7 34.7,28.6 U1.P$75 | U3.1 12.05,31.95 12.6,32.5 U3.9 | U3.9 13,32.5 13.55,31.95 U3.4 | U3.9 13.05,32.75 U3.6 | 12.88,32.59 U3.9 | C25.2 8.1,32.2 C33.2 | C39.2 11.3,29.4 v11.7,29 | 34.81,12.09 J2.5 J2.3 36.95,12.7 v37,12.7 | C20.2 C6.2
  other vias: 30.3,30.6 30,32 25.8,32 25.8,33.3 7.3,10.1 9.3,9.8 2.3,30.6 6.8,33.2 18.7,1.7 29.9,1.6 36.3,5 32.8,22.9 30.3,24.5 39.3,32.2 41.5,33 40.9,29.8 15.9,28.9 20.8,30.6 25.2,30.6 12.5,28.2 14.2,30.6 9.3,23.9 10.5,26 43.6,16.1 42.9,14.3 41.7,12.6 42.9,13 2.7,9.3 1.7,4.9 37.9,22.6 29.4,28.6 41.1,19.7 39.3,19.4 39,26.5 42.4,24.8 42.4,24.2 41.6,24.8 41.6,24.2
  pour Top: -2.47,-3.02 47.72,-3.02 47.72,37.12 -2.52,37.12 -2.52,-2.97
  pour Bottom: -2.52,-3.03 47.73,-3.42 47.73,37.12 -2.52,37.12
HAPTIC_EN  (via drill 0.2)
  Top 0.15: IC2.A1 43.4,14.7 41.3,16.8 v41.3,17 | v34.3,16.6 32.6,16.6 32.4,16.4 31,16.4 30.5,16.9 30.5,18.7 v28.9,20.3
  Bottom 0.15: v41.3,17 34.7,17 v34.3,16.6 | v28.9,20.3 28.9,23.9 30.15,25.15 32.85,25.15 U1.P$U1
  other vias: 32.95,25.25
IMU_INT1  (via drill 0.2)
  Top 0.15: IC3.5 14.97,26.15 15.72,25.4 v16.9,25.4 | v29.65,26.05 30.2,25.5 31.8,25.5 32.55,26.25 U1.P$N1
  Bottom 0.15: v16.9,25.4 16.9,25.6 17.5,26.2 29.5,26.2 v29.65,26.05
IMU_INT2  (via drill 0.2)
  Top 0.15: IC3.6 14.97,26.65 15.82,25.8 17.5,25.8 v17.6,25.7
  Bottom 0.15: U1.P$P2 30.15,26 29.8,25.65 29,25.65 28.8,25.85 17.75,25.85 v17.6,25.7
  other vias: 33.45,26
LX1
  Top 0.203: IC9.B2 IC9.B3 5.2,29.9 4.57,30.53
  Top 0.305: 4.57,30.53 L7.1
LX2
  Top 0.203: IC9.D3 6,29.9
  Top 0.254: IC9.D2 IC9.D3
  Top 0.305: 6,29.9 6.63,30.53 L7.2
MOSI  (via drill 0.2)
  Top 0.15: J1.14 9.72,16.75 8.6,17.88 v8.6,19.4
  Bottom 0.15: v8.6,19.4 9.2,20 10,20 11.7,21.7 11.7,26.3 13.2,27.8 33,27.8 34.45,29.25 U1.P$B13
  other vias: 36.2,29.25
N$1
  Top 0.15: IC9.D1 6,28.1 7.28,26.82 R4.2
N$2
  Top 0.305: IC1.D1 16.5,33.1 15.7,33.9 R9.2
N$3
  Top 0.15: IC3.1 13.18,25.7 11.68,25.7 R3.2
N$4
  Top 0.15: IC9.E1 7.01,28.3 7.93,27.38 R2.2
N$6
  Top 0.15: L2.2 36.4,33.33 L3.1
N$8
  Top 0.15: 33.73,29.28 U1.P$B3 33.7,30.12 34,30.42 L2.1
N$9
  Top 0.15: C13.1 37.51,29.75 U1.P$A18
N$10
  Top 0.15: U1.P$H23 39.05,27.6 41.67,27.6 41.94,27.86 | 41.94,27.86 L1.2 | C3.1 43.81,27.86 41.94,27.86
N$11
  Top 0.15: U1.P$A23 40.25,29.75 41.7,31.2 | X1.3 41.75,31.15 41.7,31.2 | C2.1 41.66,31.24 41.7,31.2
N$12
  Top 0.15: U1.P$B24 42.65,29.25 43.17,29.77 X1.1 43.41,29.74 C1.1
N$13
  Top 0.15: L1.1 42,25.7 | 42,25.7 42,22.5 ANT1.1 | C4.1 43.86,25.7 | C4.1 C22.1 | C4.1 42.05,25.74 42,25.7
N$14
  Top 0.15: C9.1 39.55,26.15 U1.P$N24
N$15
  Top 0.15: J1.24 11.65,11.75 12.6,10.8 18.4,10.8 19.1,11.5 EPD_C12.2
N$16
  Top 0.127: 34.05,23.6 C20.1
  Top 0.15: U1.P$AC5 34.05,23.6
N$17
  Top 0.305: C2-EP-DR.2 D5.2 14.05,9.6 11.6,9.6 11.1,9.1 11.1,7.5 9.2,5.6 9.2,4.2 8.8,3.8 7,3.8 5.95,2.75 | Q3.3 2.75,7.9 2.75,4.55 3.5,3.8 4.9,3.8 5.95,2.75 | L5.1 6.1,2.6 5.95,2.75
N$18
  Top 0.305: C2-EP-DR.1 17.85,7.2 D4.2 D2.1
N$20
  Top 0.15: SJ1.2 1.3,8.16 0.7,8.76 0.7,9.68 1.02,10 R1_EP_DR.1 1.32,9.6 R_TYPE_SEL.2
N$21
  Top 0.15: J4.A5 24.25,28.05 24.62,27.68 R1_USB.2
N$22
  Top 0.15: J1.22 11.95,12.75 13,11.7 16.1,11.7 17,12.6 17,13.3 17.3,13.6 EPD_C10.2
N$23
  Top 0.15: J4.B5 21.25,28.23 R2_USB.1
N$24
  Top 0.15: J1.20 12.15,13.75 12.3,13.6 14.5,13.6 14.7,13.8 14.9,13.8 EPD_C8.2
N$25
  Top 0.15: J1.19 12.15,14.25 12.5,13.9 14.4,13.9 14.6,14.1 EPD_C7.2
N$26
  Top 0.15: J1.18 12.05,14.75 12.4,14.4 EPD_C6.2
N$27
  Top 0.15: J1.4 12.56,21.75 12.93,21.57 EPD_C2.2
N$28
  Top 0.15: J1.5 10.57,21.2 12.2,21.2 EPD_C1.2
N$32
  Top 0.15: C32.2 42.8,15.87 IC2.A2
OUT+
  Top 0.15: IC2.A3 44.6,17.8 TP_OP.TP
OUT-
  Top 0.152: TP_ON.TP 44.6,11.3 IC2.C3
P0.00/XL1
  Top 0.15: U1.P$D2 33.35,28.4 31.75,28.4 30.6,29.55 X2.1 | 29.8,29.65 X2.1 | X2.1 30.05,29.65 29.6,30.1 29.6,30.74 C17.2
P0.01/XL2
  Top 0.15: U1.P$F2 33.35,28.1 31.55,28.1 X2.2 30.91,27.15 31.55,26.5 C18.2
P0.13  (via drill 0.2)
  Top 0.15: SW_UP.2 10.6,4.1 | 10.6,4.1 10.6,4.28 10.66,4.34 10.66,4.64 | C30.1 11.12,5.1 10.66,4.64 | R5.1 10.66,4.94 10.66,4.64 | U1.P$AD8 34.6,22.9 34.6,22.4 35.4,21.6 v35.5,21.6 | v10.1,5.1 10.1,4.6 10.6,4.1
  Bottom 0.15: v35.5,21.6 32.1,18.2 32.1,7.7 29.3,4.9 10.3,4.9 v10.1,5.1
P0.14  (via drill 0.2)
  Top 0.15: 21.6,4.4 SW_ENT.2 21.2,4.22 v21.2,5.5 | 21.6,4.4 21.6,4.8 22.4,5.6 R8.1 | C31.1 22.2,5 21.6,4.4 | v31.5,16.9 31.5,18.3 30.3,19.5 30.3,20 30.7,20.4 v32.3,20.4
  Bottom 0.15: v21.2,5.5 29.2,5.5 31.8,8.1 31.8,16.6 v31.5,16.9 | v32.3,20.4 34.4,22.5 34.4,22.95 U1.P$AC9
  other vias: 35.2,23.75
P1.01  (via drill 0.2)
  Top 0.15: R_PWR_EPD.1 12.32,6.53 Q1.1 12.1,7.3 v12.4,7.6 | v31.4,15.7 31.8,16.1 v33,16.1
  Bottom 0.15: v12.4,7.6 13.2,6.8 29.7,6.8 31.4,8.5 v31.4,15.7 | v33,16.1 33,17.9 37.5,22.4 37.5,22.95 38.95,24.4 U1.P$Y23
  other vias: 38.95,24.5
P1.02  (via drill 0.2)
  Top 0.15: 32.6,4.7 SW_DN.2 32.13,3.97 v31.7,4.4 | 32.6,4.7 32.6,5 33.3,5.7 R7.1 | C29.1 33,5.1 32.6,4.7 | U1.P$W24 39.5,24.75 39.9,24.35 v39.9,18.9
  Bottom 0.15: v31.7,4.4 37,4.4 41.3,8.7 41.3,14.3 41.8,14.8 41.8,17.3 40.2,18.9 v39.9,18.9
PMIC_INT  (via drill 0.2)
  Top 0.15: v27.3,25.3 27.3,27.7 28.3,28.7 28.3,30.3 27.5,31.1 IC1.A1
  Bottom 0.15: v27.3,25.3 29.9,25.3 30.3,25.7 33.15,25.7 33.35,25.5 U1.P$T2
  other vias: 33.45,25.5
PREVGH
  Top 0.305: J1.21 12.05,13.25 12.1,13.2 13.4,13.2 14.1,12.5 D5.1 15.45,12.75 16.4,13.7 EPD_C9.2
PREVGL
  Top 0.305: EPD_C11.2 18.2,12.75 D2.2 18,11.7 17.6,11.3 12.7,11.3 11.75,12.25 J1.23
RESE  (via drill 0.2)
  Top 0.15: v9.6,21 9.6,21.7 10.15,22.25 J1.3 | v8.4,20.7 7.5,19.8 7.5,12.5 8.7,11.3 8.7,10.8 7.45,9.55 Q3.2 5.4,10 R1_EP_DR.2
  Bottom 0.15: v8.4,20.7 8.7,21 v9.6,21
RESET  (via drill 0.2)
  Top 0.15: TP_RESET.TP 37.8,6.6 37.6,6.6 37.2,7 34.5,7 33.8,7.7 33.8,9.2 | J2.6 34.81,10.21 33.8,9.2 | 33.8,9.2 33.5,8.9 v33.3,8.9
  Bottom 0.15: v33.3,8.9 32.8,8.9 32.4,9.3 32.4,17.8 36.2,21.6 U1.P$AC13
  other vias: 36.2,23.75
SCK  (via drill 0.2)
  Top 0.15: J1.13 9.75,17.25 9.3,17.7 9.3,20.1 v9.6,20.4
  Bottom 0.15: U1.P$A12 34.45,29.75 32.85,28.15 13.15,28.15 11.35,26.35 11.35,21.75 10,20.4 v9.6,20.4
  other vias: 35.95,29.75
SCL  (via drill 0.2, 0.35)
  Top 0.15: v8.5,33.8 8.79,34.09 12.55,34.09 U3.7 | 6.62,25.9 R17.2 6.23,26.3 2.5,26.3 TP_SCL.TP | v10.8,27.5 11.5,27.5 12.6,26.4 v12.6,26.1 13.18,26.1 IC3.12 | R4.1 6.43,26.8 TP_SCL.TP | v17.6,31.7 17.4,31.5 IC1.B1 | v17.8,28.6 17.8,28.4 v19.1,27.1 | v5.9,27.3 2.5,27.3 TP_SCL.TP | C34.2 43.6,12.82 IC2.C1 42.4,13.7 41.2,14.9 41.2,16.2 40.4,17 v40.4,17.4 | v28,27.1 28,25.3 v29.6,23.7 | v30.8,19.8 31.1,19.5 36.4,19.5 v38.2,17.7
  Bottom 0.15: v8.5,33.8 8.5,32.1 10.8,29.8 v10.8,27.5 6.1,27.5 v5.9,27.3 | v12.6,26.1 12.6,25.4 12.9,25.1 15.4,25.1 17.4,27.1 v19.1,27.1 v28,27.1 28.1,27.2 32.55,27.2 33.25,26.5 U1.P$M2 | v17.6,31.7 17.6,28.8 v17.8,28.6 | v29.6,23.7 29.6,21 v30.8,19.8 | v40.4,17.4 38.5,17.4 v38.2,17.7
  other vias: 33.45,26.5
SDA  (via drill 0.2, 0.35)
  Top 0.15: v9,33.2 9.5,33.7 11.84,33.7 U3.8 12.05,33.8 | R2.1 8.2,26.4 v8.3,26.3 8.82,26.82 R18.2 9,27.27 TP_SDA.TP | v11.3,27 10.6,27 10,26.4 10,25.88 11.18,24.7 v13.5,24.7 13.75,24.95 IC3.2 | U1.P$L1 v32.25,26.75 | IC1.C1 16.8,31.9 v17.2,32.3 | v17.2,28.6 17.2,28.15 v18.7,26.65 | v28.6,26.65 28.6,25.4 30.3,23.7 v30.3,22.7 | v35.9,20 v31.6,20 | v39.9,18 42.5,18 v42.9,17.6
  Bottom 0.15: v9,33.2 9,32.2 11.3,29.9 v11.3,27 11.3,26.7 11,26.4 8.4,26.4 v8.3,26.3 | v13.5,24.7 15.5,24.7 17.45,26.65 v18.7,26.65 v28.6,26.65 28.7,26.75 v32.25,26.75 | v17.2,32.3 v17.2,28.6 | v30.3,22.7 30.3,21.3 v31.6,20 | v35.9,20 37.9,20 v39.9,18 | v42.9,17.6 44.1,16.4 IC2.B2
  other vias: 44.1,14.2
SWDCLK  (via drill 0.2)
  Top 0.15: J2.4 37.1,9.55 37.1,7.6 37.7,7 39.8,7 | 39.8,7 TP_SWDCLK.TP | U1.P$AA24 39.35,24.25 v38.9,23.8 | v41,7.1 40.9,7 39.8,7
  Bottom 0.15: v38.9,23.8 39,23.8 39.1,23.7 39.6,23.7 39.9,23.4 39.9,23 39.8,22.9 39.8,20.2 42.4,17.6 42.4,8.5 v41,7.1
SWDIO  (via drill 0.2)
  Top 0.15: J2.2 37.62,10.3 39.9,10.3 40.5,9.7 | 40.5,9.7 40.9,9.3 43.36,6.71 TP_SWDIO.TP | 40.5,9.7 v41.9,9.7 | v39.5,23.2 39.5,23.7 U1.P$AC24
  Bottom 0.15: v41.9,9.7 42.1,9.9 42.1,17.5 39.5,20.1 v39.5,23.2
SWO
  Top 0.15: U1.P$AD22 38.5,23.2 38.5,21.7 TP_SWO.TP
VBAT
  Top 0.203: C27.2 13.05,30.46
  Top 0.254: IC1.C2 15.3,31.9 | 15.12,31.9 C37.2
  Top 0.305: 11.6,30.5 12.3,29.8 14.7,29.8 14.9,30 14.9,31.5 15.3,31.9 15.12,31.9 | 11.6,30.5 11.6,31 10.7,31.9 TP_VBAT.TP | 11.6,30.5 12.3,30.5 12.55,30.75 U3.2 U3.3 13.05,30.46
VBUS
  Top 0.254: 16.68,29.2 C38.2 16.29,30.21
  Top 0.305: 24.5,25.7 25.2,25.7 25.7,26.2 25.7,27.9 25.4,28.2 J4.A4_B9 25.4,29.5 24.7,30.2 21.3,30.2 20.6,29.5 J4.A9_B4 | 24.5,25.7 23.2,25.7 | 23.2,25.7 22.9,25.4 | D3.5 22.9,25.4 | 22.9,25.4 22.6,25.7 | 22.6,25.7 20.8,25.7 | 20.8,25.7 C43.1 20.38,25.73 | 22.6,25.7 23.2,25.7 | 20.38,25.73 C42.1 18.57,25.73 16.68,27.62 16.68,29.2 | 20.38,25.73 20.77,25.73 20.8,25.7 | U1.P$AD2 33.45,22.75 32.7,22 31.3,22 31.1,22.2 C21.1 31.1,22.3 30.8,22 28.2,22 24.5,25.7 | 16.29,30.21 16.1,30.4 IC1.A2
VREG
  Top 0.203: 15.5,31.3 15.7,31.5 IC1.B2 | 3.59,30.31 3.48,30.41 C23.2 3.48,31.29 3.55,31.35
  Top 0.254: IC9.A3 3.59,30.31
  Top 0.305: C39.1 10.8,30.4 | C39.1 12.1,29.3 14.9,29.3 15.5,29.9 15.5,31.3 | C39.1 9.9,30.4 9.5,30.8 9.5,31.8 9.2,32.1 9,32.1 8.6,32.5 8.6,32.6 7.2,34 6.5,34 5.5,33 3.7,33 3.5,32.8 3.5,31.6 C24.2 3.55,31.35 | TP_VREG.TP 2.8,28.4 4.7,28.4 IC9.A1 IC9.A2 IC9.A3
(copper drawn outside any net)
  shapes: Bottom area x2, Top area x1

## Text on the board
tPlace: ##############********+++++++++++++++*********+**********+**++++========---------+*******+***##****# / *##*****####**#**********************++++++===+**++++++++++*+++*******++++++=====+******+****#****## / *##****+++++**++++++***#***************************++++==+**++****************++++***********#****## / #####*************++++**+++++++++**+++***********++++++++**+++*****************+++*****++****#****## / *###********#*********#****+++********++++++************++*+++*************************++***##****## / *##**+===+************#*******+********+++**************++*++**************************++***##****## / #####*******#***+===+*****+++++********+*+**************+**+****************************+***##****## / ++******####****************++*******+==++**************+***+***************************+***##***### / *****++++=======++++************************************+**++*******************+*******+***##***### / *****++++++++++++++++++=====---=**++********************+***+*******************+***********#****### / #*******+++*****++++++++++++++++**+++++++=+****************+*******************++**********##****### / ##############*****+++++++++********++===++*************+**********************++**********##****### / #################*************+****++======+++*************+*******************************##****### / ############******************++*++==------=+++=++++++==+**+*******************************#*****### / ##########********************++*++==-::::-----=-===----==-==******************************#****#### / #####*******#****************+*+++=::::::--::::..:..:.::::----=+********************************#### / #######*****#*****************++=::::::::::::::.::::::-----------+************************##****#### / ########****#****************+=--.:..:::::::..:::::::::::::--------+**********************##****#### / #######**********************+::-:..:....:::..::--::.::::::-:::::---=+*******++***********###***#### / ########*********************----.::...:::----=+==+=--::---::----:---==++++++++***********###***#### / #########*****************++=--:.::.:::::-==+****#***+==-:---:--::::----------+***********###**##### / #########******************+-::::::::.:::=+*##########**+===-=--:.::::--=+====+***********##***##### / ########****************+*+=--::.:...:.-=*##############*+=+==---:..:::-=*****************##***##### / ########*****************++=::::::::.:=+**###############**++=--::..:::-+*****+***********##***##### / #########******#**********=-::......:=+**###########%%%###**++=-:::.:::=*****************###***##### / ########********#**********+-:.....:-+***############%####***++=:::.:::-+****************###***##### / ***************###**********-......-=+*********#######***###***+=:::::::-+***************###**###### / ***************###*********+:......-++=-:..::-==+*+=-:.::::--=***-::..::-=+**************###**###### / ***************************=:......=+===-::..:-=++=-:..:-::-=++**-::..::-+***+**********###***###### / ***###**#******************+-:.....=*+=-:-:.:::=#%*=-:-::--=++***+:...::-+**************###***#####* / *######*#*******************+-.::::+****+==-==+*#%##**+++**####***::::.:+++++***********###***#####* / *###########****************+*+:--=***####**#***%%#########%#%##**++=--=====+***********###**######* / *###########*******************++--+**#######**#%%#####%%%%%#####**=*=-==---+***********###**#####** / ############****************+***+-=+++*######*+**#################*=*=**+++++**********####**#####** / #############******************=+++=++****###+:-==:-*%#***#######**##+*****++**********####**#####** / #############*********************++++****##*++=-=*#######****#####*=******************###***#####** / ############**********************+:-+++*****+++=++*****#*#***##+::++******************###**######** / ##########*************************+:++++++=--====+*****+*##*###:.=********************###**######** / ###########**********************====+++++++++======+*#*******#+:=*********************###**######*# / ############*************************=++++++++=====+***********************************###**######*# / #########*********************++++++*=:++++***#########****++*#************************##***#####**# / #########************************+++++-+++++++*+*******+++++###***********************###***#####**# / ##########*************************++***++++========+++=+++####***********************###**######**# / #########********************************+++++++++++====+*#####***********************###**######**# / ########************************+===+*****+++========++**######*******************+***###**######**# / #######************************************++++====+****#####%%%##********************###**######**# / ########*********************+===++++*******+++++++***#####%%%@#--+******************###***#####**## / *########************####*****+*++++**#**************###%@@%%%*----=*****************###***######*## / +#####************#######**##****+*+*##=+***********#%@@%@@%%=::------=**************####**#####**## / ######******#############*###*+++++**#*#*+*##**#*###%@@@@%@%=-::-----------------==++*##**######**## / ########*################**#*+++++++*#+*#**#####%####*%@@%%-:-:---------:::::------------=+*####*### / #######***###############***+==----:=#=*#**####%%%###***%%-:-::::-::::::::::::::----:--------=#***## / %%%%%####***####*########**+=-::::::=**#%%#####%%%%##**#*:--:::::::::::::::::::----:--::::::::=**### / %%%%%%%%%%%%#%%#=#%##%%#+*##:.....::=#####%%###%%###%%%%-::::::::::::.::::::::---:::::::::::---+*### / %%%%%%%%%%%%##%*=##%##%##*#*.....:::=%%%%#####%%%%%%%%%-::-:::::::::::::::::::::::::::::-------=*###